# Altium PCB Fujitsu_ESPHome.PcbDoc
Units mm, origin at the board's own origin, x right, y up, seen from the top; angles counter-clockwise.
Board outline 24.05 x 24.05 mm, 4 copper layers (Top Layer, Layer 2, Layer 3, Bottom Layer), stack 1.57 mm thick; 30 components, 16 nets, 80 pads, 49 vias.
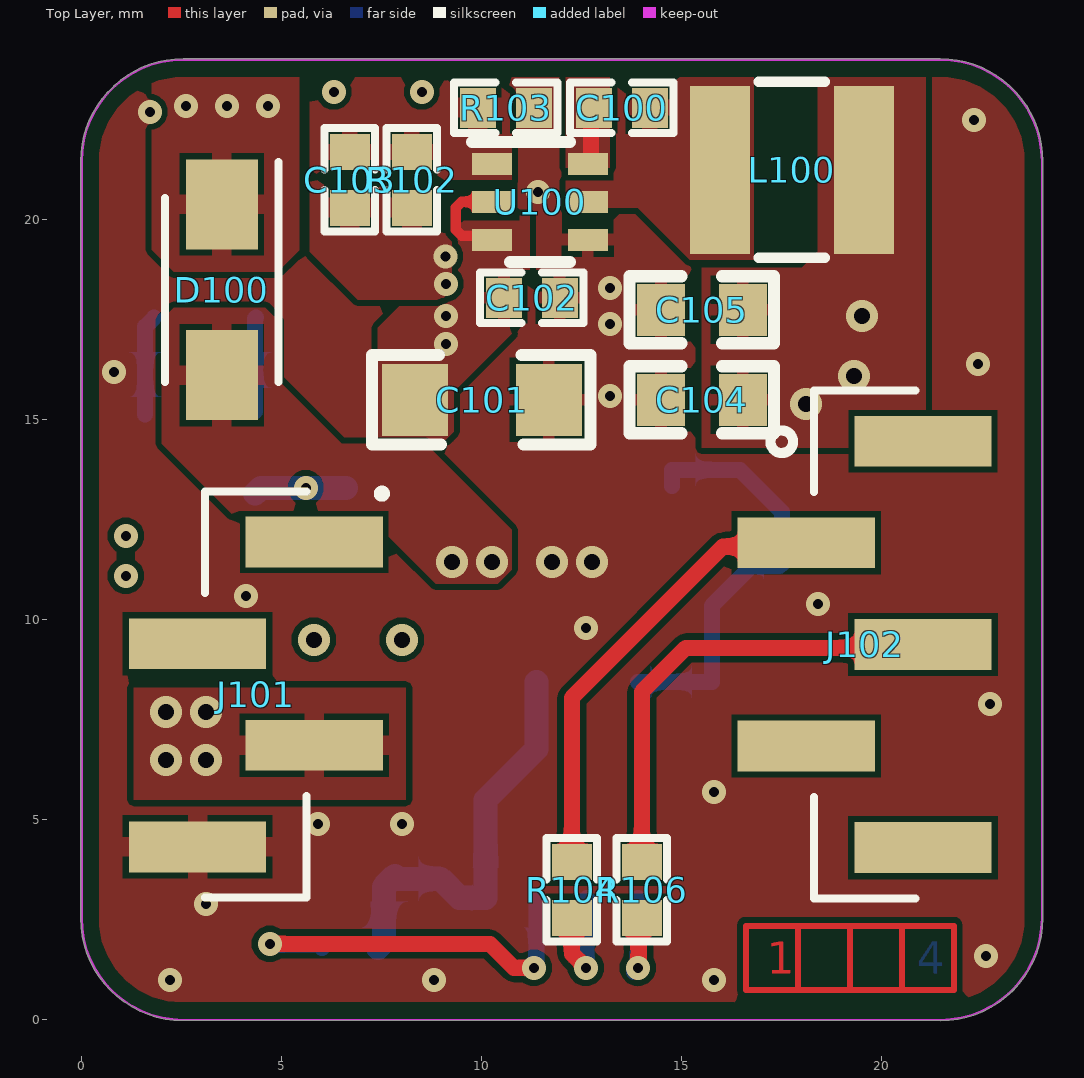
[diagram p0: Top Layer view]
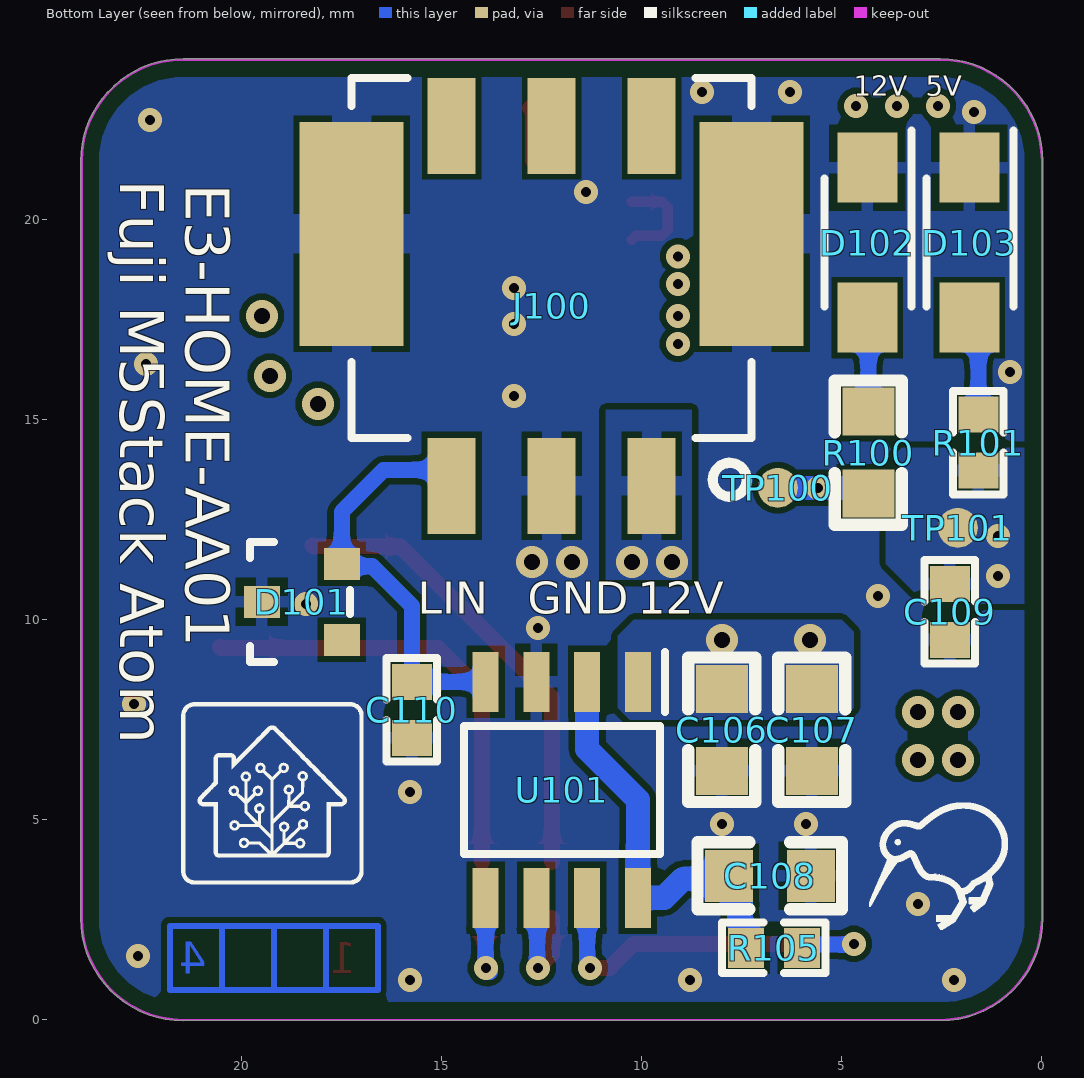
[diagram p1: Bottom Layer view, seen from below]
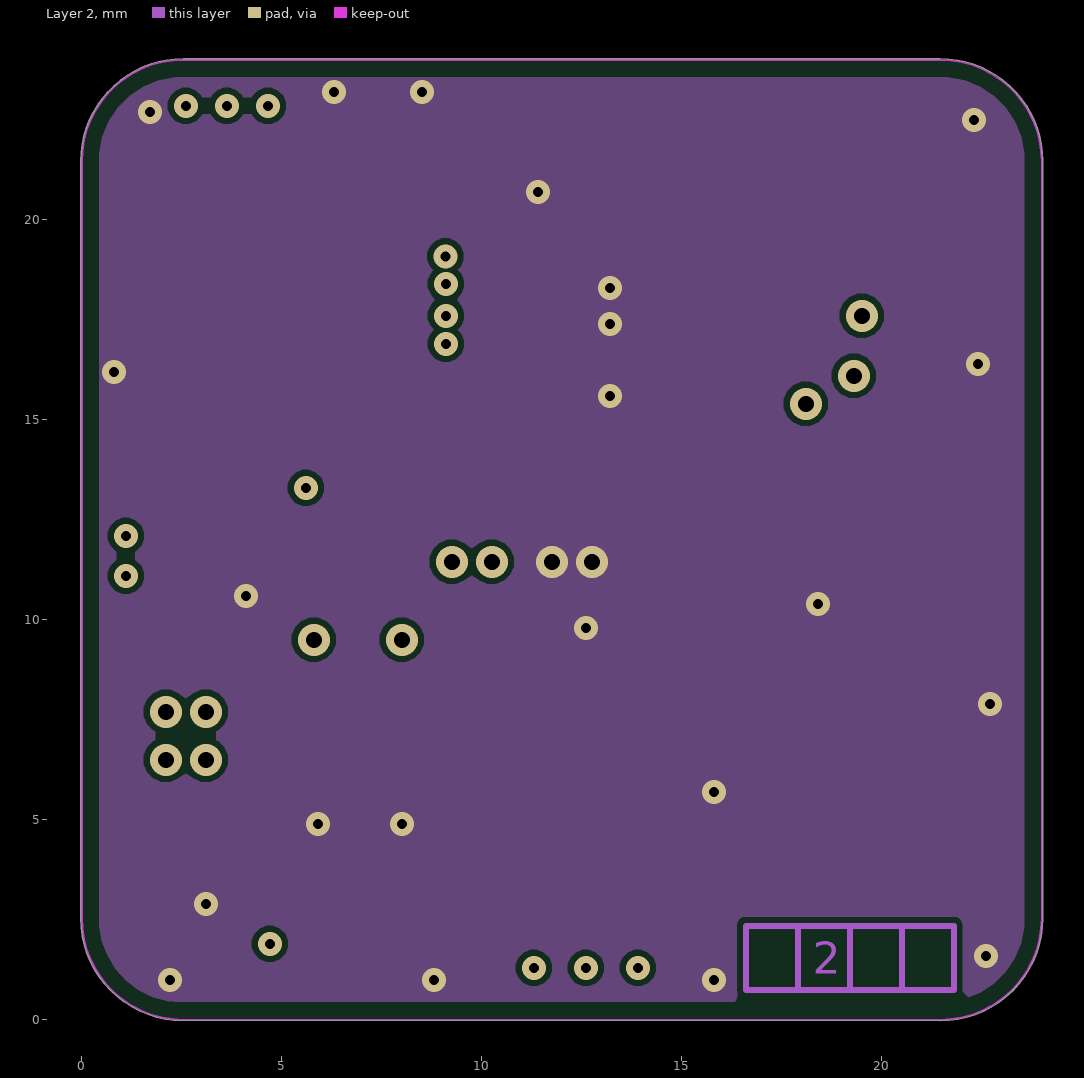
[diagram p2: Layer 2]
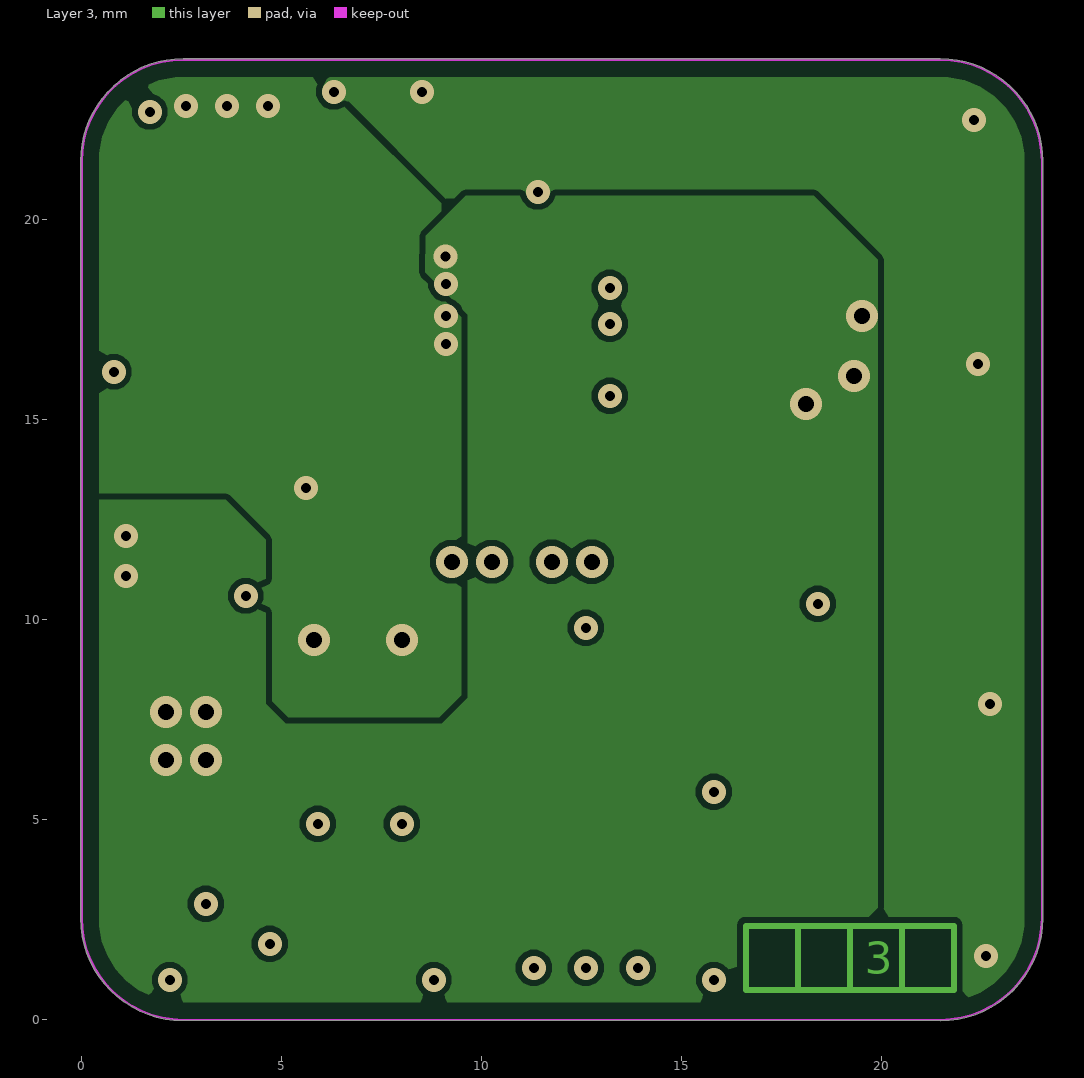
[diagram p3: Layer 3]
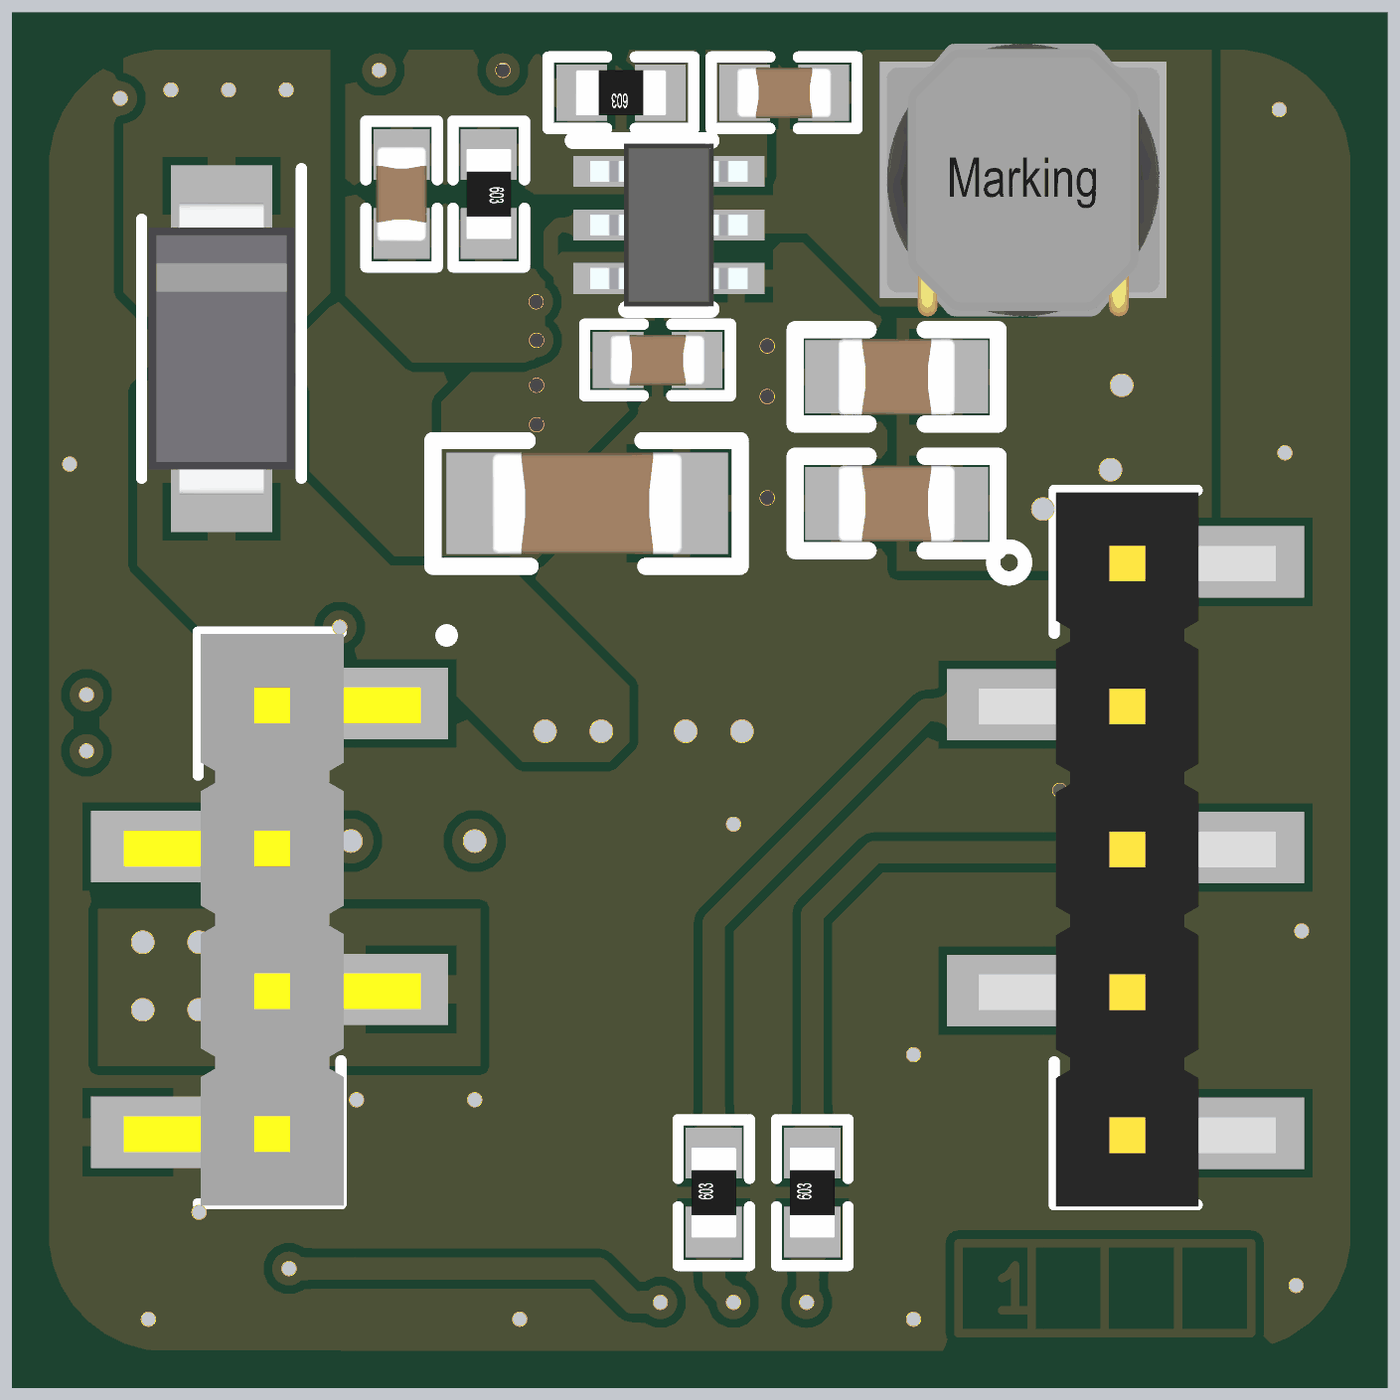
[diagram p4: 3D render of the assembled board from above, using the file's embedded part models]
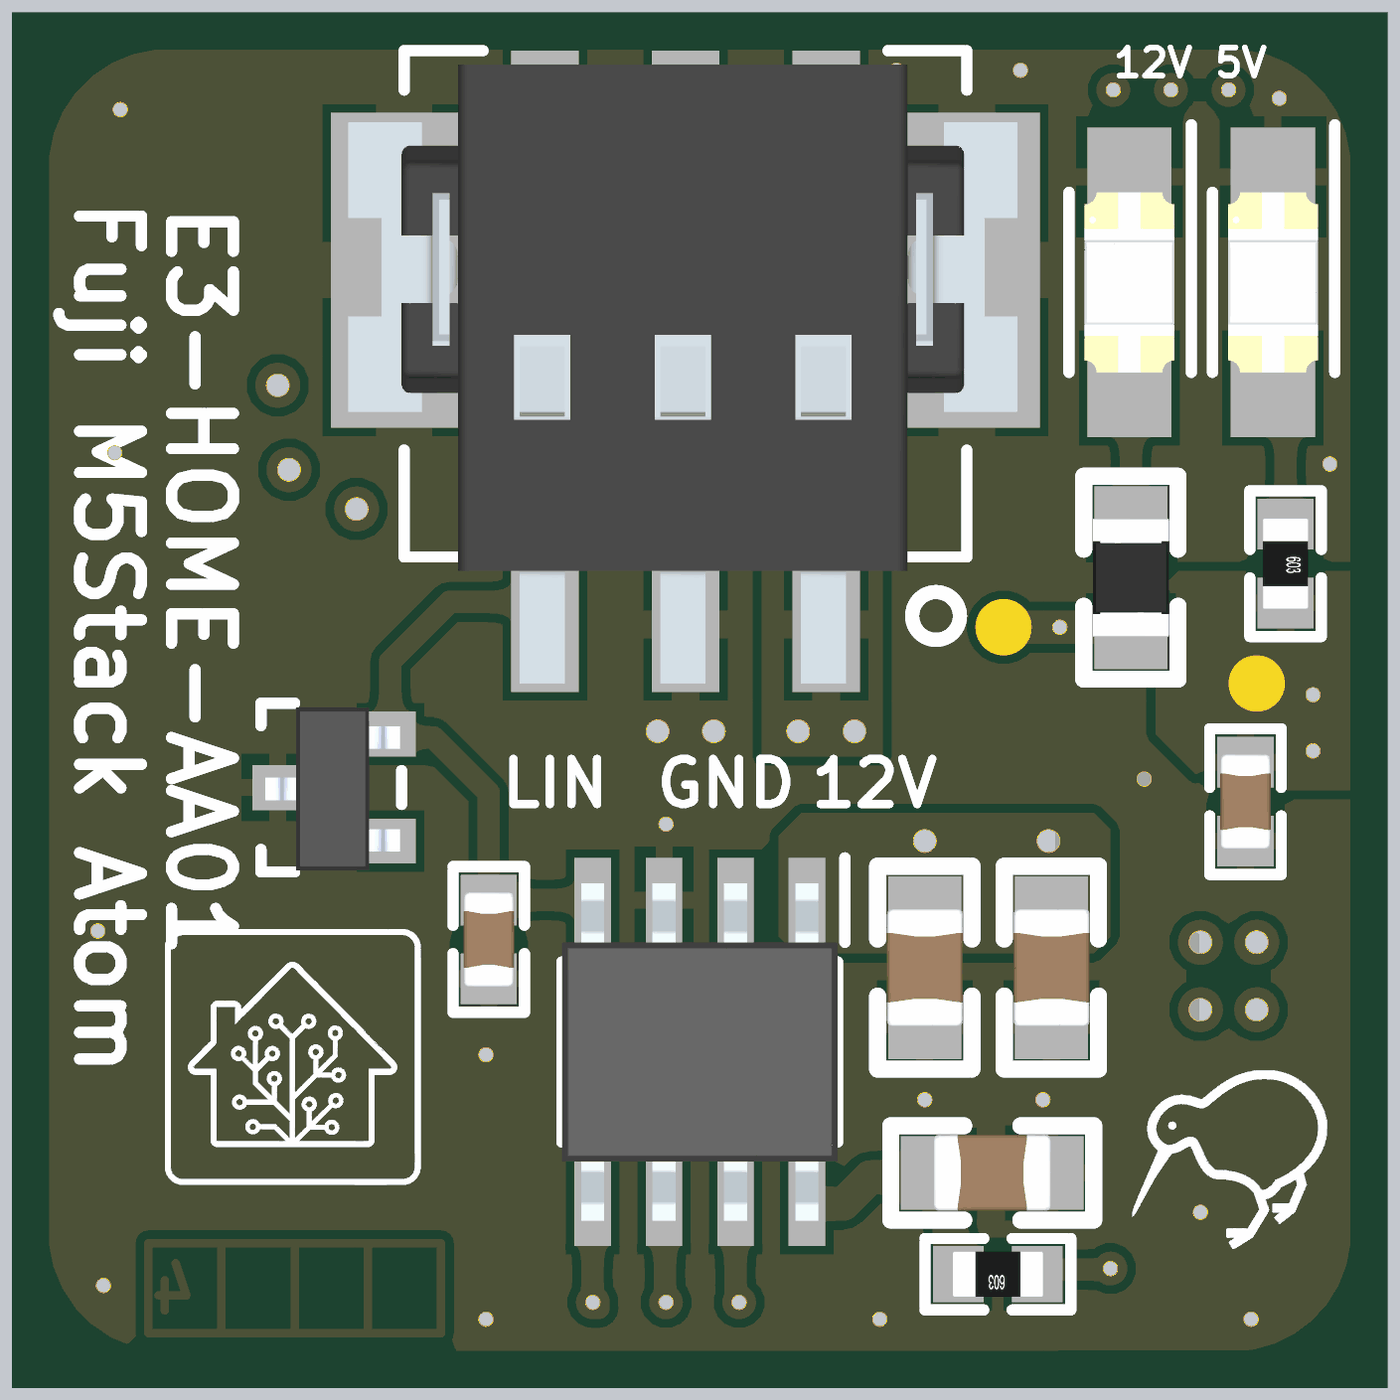
[diagram p5: 3D render of the assembled board from below, using the file's embedded part models]

## Layer stack, top to bottom
Top Solder: solder mask 0.0102, Solder Resist, Dk 3.5
Top Layer: signal copper 0.035
Dielectric 1: prepreg 0.36, FR-4, Dk 4.8
Layer 2: signal copper 0.035
Dielectric 2: core 0.71, FR-4, Dk 4.8
Layer 3: signal copper 0.035
Dielectric 3: prepreg 0.36, FR-4, Dk 4.8
Bottom Layer: signal copper 0.035
Bottom Solder: solder mask 0.0102, Solder Resist, Dk 3.5

## Board outline
2.305,-0.015 cw(c2.54,2.54) -0.025,2.54 -0.025,21.46 cw(c2.54,21.46) 2.54,24.025 21.46,24.025 cw(c21.46,21.46) 24.025,21.46 24.025,2.54 cw(c21.46,2.54) 21.46,-0.025

## Design rules (kind name [scope] priority, off if disabled: settings)
AssemblyTestPointUsage [All] p1: allowmultiple=TRUE
AssemblyTestpoint [All] p1: testpointundercomponent=FALSE minsize=0.99 maxsize=5 preferedsize=1 minholesize=0 maxholesize=1 preferedholesize=0 testpointgrid=0.025 usegrid=FALSE gridtolerance=0 allowsidetop=TRUE allowsidebottom=TRUE minspacing=2.03
BoardOutlineClearance BoardOutlineClearance_Overlay [OnLayer('Top Overlay')  or OnLayer('Bottom Overlay')] p1: gap=0 ignorepadtopadclearanceinfootprint=FALSE
BoardOutlineClearance [All] p2: gap=0.45 ignorepadtopadclearanceinfootprint=FALSE
Clearance "Clearance Mires" [InComponent('Mire*')] p1: gap=0.75 ignorepadtopadclearanceinfootprint=FALSE
Clearance Clearance-xPP-xTP-xTT [All] p2: gap=0.15 ignorepadtopadclearanceinfootprint=TRUE
ComponentClearance ComponentClearance_TP [InComponent('TP*') vs InComponent('TP*')] p1: gap=1.5 collisioncheckmode=3 verticalgap=0.5 showdistances=FALSE
ComponentClearance [All] p2: gap=0.2 collisioncheckmode=3 verticalgap=0 showdistances=FALSE
DiffPairsRouting [All] p1: maxlimit=0.2 minlimit=0.2 mostfreqgap=0.2 toplayer_minwidth=0.2 toplayer_maxwidth=0.2 toplayer_prefwidth=0.2 midlayer1_minwidth=0.2 midlayer1_maxwidth=0.2 midlayer1_prefwidth=0.2 midlayer2_minwidth=0.2 midlayer2_maxwidth=0.2 midlayer2_prefwidth=0.2 bottomlayer_minwidth=0.2 bottomlayer_maxwidth=0.2 bottomlayer_prefwidth=0.2 maxuncoupledlength=13
FabricationTestPointUsage [All] p1: valid=0 allowmultiple=TRUE
FabricationTestpoint [All] p1: side=3 testpointundercomponent=FALSE minsize=0.99 maxsize=5 preferedsize=1 minholesize=0 maxholesize=1 preferedholesize=0 testpointgrid=0.025 allowsidetop=TRUE allowsidebottom=TRUE usegrid=FALSE gridtolerance=0 minspacing=2.03
Height [All] p1: minheight=0 maxheight=28 prefheight=12.5 // 28mm : hauteur petit four
HoleSize HoleSize-PTH [All] p1: absolutevalues=TRUE maxlimit=4 minlimit=0.15 maxpercent=80.000 minpercent=20.000
HoleToHoleClearance [All] p1: gap=0.2 allowstackedmicrovias=FALSE
MatchedLengths [InDifferentialPairClass('All Differential Pairs')] p1: tolerance=0.2 checknetsindiffpair=TRUE checkdiffpairvsdiffpair=FALSE checkxsignals=FALSE checkothers=FALSE
MinimumAnnularRing "Minimum IAR  >0.45mm" [((ObjectKind = 'Pad') OR (ObjectKind = 'Via')) And (Layer = 'MultiLayer') And (HoleDiameter > AsMM(0.45))] p1: minimumring=0.15 // minimum inner annular ring for pads > 0.45mm finished hole size
MinimumAnnularRing "Minimum IAR <=0.45mm" [((ObjectKind = 'Pad') OR (ObjectKind = 'Via')) And (Layer = 'MultiLayer') And (HoleDiameter <= AsMM(0.45))] p2: minimumring=0.125 // minimum inner annular ring for pads <= 0.45mm finished hole size
MinimumSolderMaskSliver [All] p1: minsoldermaskwidth=0.1
PlaneClearance PlaneClearance-IPI [All] p1: clearance=0.2
PlaneConnect [All] p1: pad.planeconnectstyle=Relief pad.reliefexpansion=0.2 pad.reliefentries=4 pad.reliefconductorwidth=0.2 pad.reliefairgap=0.2 via.planeconnectstyle=Direct via.reliefexpansion=0.175 via.reliefentries=4 via.reliefconductorwidth=0.2 via.reliefairgap=0.2
PolygonConnect PolygonConnect-Full [All vs InPolygonClass('Full')] p1: thpad.connectstyle=Relief thpad.reliefconductorwidth=0.3 thpad.reliefentries=4 thpad.polygonreliefangle="90 Angle" thpad.airgapwidth=0.2 smdpad.connectstyle=Direct smdpad.reliefconductorwidth=0.2 smdpad.reliefentries=4 smdpad.polygonreliefangle="90 Angle" smdpad.airgapwidth=0.15 via.connectstyle=Direct via.reliefconductorwidth=0.2 via.reliefentries=4 via.polygonreliefangle="90 Angle" via.airgapwidth=0.15
PolygonConnect PolygonConnect-xTW [All] p2: thpad.connectstyle=Relief thpad.reliefconductorwidth=0.3 thpad.reliefentries=4 thpad.polygonreliefangle="90 Angle" thpad.airgapwidth=0.2 smdpad.connectstyle=Relief smdpad.reliefconductorwidth=0.3 smdpad.reliefentries=4 smdpad.polygonreliefangle="90 Angle" smdpad.airgapwidth=0.2 via.connectstyle=Direct via.reliefconductorwidth=0.2 via.reliefentries=4 via.polygonreliefangle="90 Angle" via.airgapwidth=0.15
RoutingCorners [All] p1: cornerstyle=45-Degree minsetback=2.5 maxsetback=2.5
RoutingLayers [All] p1: top layer_v5=TRUE mid layer 1_v5=FALSE mid layer 2_v5=FALSE bottom layer_v5=TRUE
RoutingVias [All] p1: holewidth=0.15 width=0.5 viastyle="Through Hole" minholewidth=0.15 minwidth=0.5 maxholewidth=0.2 maxwidth=0.6 useviatemplates=TRUE viatemplateguid#1={6DD71CDC-54A3-47C1-A7D8-5A110E9AF148} viatemplateguid#2={082E8A28-E7FB-4A83-87C6-A1A99772F00C} viatemplateguid#3={939C714F-5D4A-4B2A-A1F1-60A581F9FBD7} viatemplateguid#4={54C6AECE-85AB-4322-93B8-8F76CF948F42} viatemplatename#1=v50h15m0mx0 viatemplatename#2=v60h25m0mx0 viatemplatename#3=v80h40m0mx0 viatemplatename#4=v300h300
SilkToSilkClearance [All] p1 off: silktosilkclearance=0.02
SilkToSolderMaskClearance SilkscreenOverComponentPads [IsPad] p1: minsilkscreentomaskgap=0.02 clearancetoexposedcopper=TRUE
SolderMaskExpansion SolderMaskExpansion_via [IsVia] p1: expansion=0 istentingtop=TRUE
SolderMaskExpansion SolderMaskExpansion_pad [IsPad] p2: expansion=0 istentingtop=FALSE
SupplyNets "Schematic Supply Nets_4" [InNet('12V')] p1: voltage=0.000
SupplyNets "Schematic Supply Nets_3" [InNet('12V_FP')] p2: voltage=0.000
SupplyNets "Schematic Supply Nets_2" [InNet('3V3')] p3: voltage=0.000
SupplyNets "Schematic Supply Nets_1" [InNet('GND')] p4: voltage=0.000
SupplyNets "Schematic Supply Nets" [InNet('5V')] p5: voltage=0.000
UnRoutedNet [not(IsTrack and OnLayer('Multi-Layer'))] p1: checkbadconnections=TRUE
Width Width-xTW [All] p1: maxlimit=2.5 minlimit=0.2 preferedwidth=0.2
13 further rules are at their usual default settings.

## Classes and differential pairs
net class 12V: 12V_FP
net class 2A: 12V_FP
net class 2AMP: 5V

## Components (designator, comment, footprint, x,y, rotation, side; value= is the part's Value field where it differs from the comment)
C100 "100nF" 0603_CAPA 13.5,22.8 r0 top
C101 "10uF" 1206_CAPA 10,15.5 r0 top
C102 "100nF" 0603_CAPA 11.25,18.05 r0 top
C103 "47pF" 0603_CAPA 6.7,21 r90 top
C104 "22uF" 0805_CAPA 15.5,15.5 r180 top
C105 "22uF" 0805_CAPA 15.5,17.75 r180 top
C106 "22uF" 0805_CAPA 8,7.25 r270 bottom
C107 "22uF" 0805_CAPA 5.75,7.25 r270 bottom
C108 "22uF" 0805_CAPA 6.8,3.6 r180 bottom
C109 "100nF" 0603_CAPA 2.3,10.2 r270 bottom
C110 "220pF" 0603_CAPA 15.75,7.75 r270 bottom
D100 "B340A-13-F" DIODE_B340A-13-F 3.5,18.25 r270 top
D101 "MMBZ27VAL-7-F" ESD_MMBZ27VAL-7-F 19.5,10.45 r90 bottom
D102 "APT3216LZGCK" LED_APT3216LZGCK 4.362,19.43 r90 bottom
D103 "APT3216LZGCK" LED_APT3216LZGCK 1.812,19.43 r90 bottom
J100 "691805010303" 691805010303 12,18.6 r180 bottom
J101 "TSM-104-01-L-SV-P-TR" TSM-104-01-L-SV-P-TR 4.25,8.15 r270 top
J102 "TSM-105-01-F-SV" TSM-105-01-F-SV 19.7,9.35 r90 top locked
L100 "SRN5040TA-6R8M" INDUCTOR_652-SRN5040TA-100M 17.75,21.25 r0 top
R100 "3K" 0805_RES 4.337,14.18 r270 bottom
R101 "1K" 0603_RES 1.587,14.43 r270 bottom
R102 "158K" 0603_RES 8.25,21 r270 top
R103 "30K1" 0603_RES 10.6,22.8 r180 top
R104 "0" 0603_RES 12.25,3.25 r90 top
R105 "30K1" 0603_RES 6.7,1.8 r0 bottom
R106 "0" 0603_RES 14,3.25 r90 top
TP100 "5V_BUCK" PTEST 6.6,13.3 r90 bottom
TP101 "5V_BUCK" PTEST 2.1,12.3 r90 bottom
U100 "AP63300WU-7" POWER_BUCK_AP63300WU-7 11.45,20.45 r0 top
U101 "MCP2025-330E-SN" MCP2025-330E-SN 12,5.75 r270 bottom

## Footprints (in the part's own frame and the unit in brackets; to place one, negate y for a bottom-side part, rotate by r counter-clockwise, add the part's x,y. Pads: shape width x height; smd on the part's side, far side on the other; paste and mask are expansions set on the pad)
0603_CAPA [mm]
  rect 0.9x1 smd: 1(-0.7,0) 2(0.7,0)
  silkscreen extent -1.3,-0.64 1.3,0.64, body extent -0.85,-0.45 0.85,0.45, height 0.91
0603_RES [mm]
  rect 0.9x1 smd: 1(-0.7,0) 2(0.7,0)
  silkscreen extent -1.3,-0.63 1.3,0.64, body extent -0.8,-0.4 0.8,0.4, height 0.3
0805_CAPA [mm]
  rect 1.2x1.3 smd: 1(-1.025,0) 2(1.025,0)
  silkscreen extent -1.8,-0.84 1.8,0.84, body extent -1.05,-0.67 1.05,0.68, height 1.36
0805_RES [mm]
  rect 1.2x1.3 smd: 1(-1.025,0) 2(1.025,0)
  silkscreen extent -1.8,-0.84 1.8,0.84, body extent -1.05,-0.67 1.05,0.68, height 0.61
1206_CAPA [mm]
  rect 1.65x1.8 smd: 1(-1.675,0) 2(1.675,0)
  silkscreen extent -2.74,-1.12 2.72,1.12, body extent -1.7,-0.9 1.7,0.9, height 1.8
691805010303 [mm]
  rect 1.2x2.4 smd: 1(2.247,-5.252) 2(-0.253,-5.252) 3(-2.753,-5.252) 4(2.247,3.748) 5(-0.253,3.748) 6(-2.753,3.748)
  rect 2.6x5.6 smd: MP1(4.747,1.048) MP2(-5.253,1.048)
  silkscreen extent -5.25,-5.52 4.75,4.95, body extent -6.25,-6.3 5.65,4.7, height 5
DIODE_B340A-13-F [mm]
  rect 2.25x1.8 smd: 1(-2.134,0) 2(2.134,0)
  silkscreen extent -3.2,-1.42 2.3,1.42, body extent -2.6,-1.3 2.6,1.3, height 2.4
ESD_MMBZ27VAL-7-F [mm]
  rect 0.8x0.9 smd: 1(-0.95,-2) 2(0.95,-2) 3(0,0)
  silkscreen extent -1.5,-2.2 1.5,0.3, body extent -1.48,-2.17 1.42,0.23, height 1.15
INDUCTOR_652-SRN5040TA-100M [mm] "SRN5040TA-100M"
  rect 1.5x4.2 smd: 1(-1.8,0) 2(1.8,0)
  silkscreen extent -0.82,-2.2 0.83,2.2, body extent -2.43,-2.42 2.42,2.43, height 3.86
LED_APT3216LZGCK [mm]
  rect 1.75x1.5 smd: 1(-1.875,0) 2(1.875,0)
  silkscreen extent -1.6,-1.1 2.8,1.07, body extent -1.6,-0.8 1.6,0.8, height 1.1
MCP2025-330E-SN [mm]
  rect 1.5x0.65 smd: 1(-2.7,1.905) 2(-2.7,0.635) 3(-2.7,-0.635) 4(-2.7,-1.905) 5(2.7,-1.905) 6(2.7,-0.635) 7(2.7,0.635) 8(2.7,1.905)
  silkscreen extent -3.45,-2.45 1.6,2.58, body extent -3,-2.45 3,2.45, height 1.75
POWER_BUCK_AP63300WU-7 [mm] "TSOT à 5 pins"
  rect 1x0.55 smd: 1(-1.2,0.95) 2(-1.2,0) 3(-1.2,-0.95) 4(1.2,-0.95) 5(1.2,0) 6(1.2,0.95)
  silkscreen extent -1.7,-1.5 0.75,1.5, body extent -1.4,-1.45 1.4,1.45, height 0.9
PTEST [mm]
  round 1 smd paste-2539.97: 1(0,0)
TSM-104-01-L-SV-P-TR [mm]
  rect 1.27x3.43 smd: 1(-3.792,1.564) 2(-1.252,-1.356) 3(1.288,1.564) 4(3.828,-1.356)
  silkscreen extent -5.1,-1.17 5.1,3.35, body extent -5.03,-2.49 5.13,2.79, height 9.68
TSM-105-01-F-SV [mm]
  rect 1.27x3.43 smd: 1(5.113,-1.331) 2(2.573,1.589) 3(0.033,-1.331) 4(-2.507,1.589) 5(-5.047,-1.331)
  silkscreen extent -6.32,-1.14 6.38,2.48, body extent -6.35,-2.54 6.35,2.74, height 9.65

## Part data
C100 C102 C109: library part CAPA_CMS_100nF_50V_0603_5%_X7R, "100nF_50V_0603_5%_X7R", Tolerance=5%, Manufacturer Part Number=CAPA_CMS_100nF_50V_0603_5%_X7R, Mounting Type=CMS
C101: library part CAPA_CMS_10uF_50V_1206_10%_X7R, "10uF_50V_1206_10%_X7R", Tolerance=10%, Manufacturer Part Number=CAPA_CMS_10uF_50V_1206_10%_X7R, Mounting Type=CMS
C103: library part CAPA_CMS_47pF_50V_0603_5%_X7R, "47pF_50V_0603_5%_X7R", Tolerance=5%, Manufacturer Part Number=CAPA_CMS_47pF_50V_0603_5%_X7R, Mounting Type=CMS
C104 C105 C106 C107 C108: library part CAPA_CMS_22uF_16V_0805_10%_X5R, "22uF_16V_0805_10%_X5R", Tolerance=10%, Manufacturer Part Number=CAPA_CMS_22uF_16V_0805_10%_X5R, Mounting Type=CMS
C110: library part CAPA_CMS_220pF_50V_0603_10%_X7R, "220pF_50V_0603_10%_X7R", Tolerance=10%, Manufacturer Part Number=CAPA_CMS_220pF_50V_0603_10%_X7R, Mounting Type=CMS
D100: "Diodes et redresseurs Schottky 40V 3A", Current Rating=3A, Manufacturer=Diodes, Voltage Rating=40V, ComponentLink1Description=https://www.mouser.fr/datasheet/2/115/ds30891-89887.pdf, Diode Type=Schottky, Life Status=Active, Manufacturer Part Number=B340A-13-F, Mounting Type=CMS
D101: "Suppresseurs ESD / diodes TVS 27V 225mW", Voltage Rating=27V, ComponentLink1Description=https://www.mouser.fr/datasheet/2/115/DIOD_S_A0012799209_1-2543783.pdf, Diode Type=TVS, Life Status=Active, Manufacturer Part Number=MMBZ27VAL-7-F, Mounting Type=CMS
D102 D103: "LED CMS Green 3.2x1.6mm", Color=Green, Manufacturer=Kingbright, Nominal Current=20mA, Supplier Part Number 1=604-APT3216LZGCK, ComponentLink1Description=https://www.kingbrightusa.com/images/catalog/SPEC/APT3216LZGCK.pdf, Life Status=Active, Light Intensity=100mcd, Manufacturer Part Number=APT3216LZGCK, Mounting Type=CMS, Supplier 1=Mouser
J100: "WR-TBL Series 8050 - 3 pins 2.50 mm Screwless SMT", Manufacturer="Wurth Elektronik", Supplier Part Number 1=710-691805010303, ComponentLink1Description=https://www.we-online.com/components/products/datasheet/691805010303.pdf, Connector Type=BORNIER, Life Status=Active, Manufacturer Part Number=691805010303, Mounting Type=CMS, Supplier 1=Mouser
J101: "Header male SMD 1x4", Manufacturer=Samtec, ComponentLink1Description=https://suddendocs.samtec.com/catalog_english/tsm.pdf, Connector Type=HEADER, Life Status=Active, Manufacturer Part Number=TSM-104-01-L-SV-P-TR, Mounting Type=CMS
J102: "Header male SMD 1x5", Manufacturer=SAMTEC, Supplier Part Number 1=200-TSM10501FSV, ComponentLink1Description=https://suddendocs.samtec.com/catalog_english/tsm.pdf, Connector Type=HEADER, Life Status=Active, Manufacturer Part Number=TSM-105-01-F-SV, Mounting Type=CMS, Supplier 1=Mouser
L100: "Inductance fixes 6.8uH 2.5A", Current Rating=2.5A, Inductance=6.8uH, Manufacturer=Bourns, ComponentLink1Description=https://www.mouser.fr/ProductDetail/Bourns/SRN5040TA-6R8M?qs=qSfuJ%252Bfl%2Fd6O0PuOfrvvvw%3D%3D, Life Status=Active, Manufacturer Part Number=SRN5040TA-6R8M, Mounting Type=CMS
R100: library part RES_CMS_3K_1/8W_0805_1%, "3K_1/8W_0805_1%", Tolerance=1%, Manufacturer Part Number=RES_CMS_3K_1/8W_0805_1%, Mounting Type=CMS
R101: library part RES_CMS_1K_1/10W_0603_1%, "1K_1/10W_0603_1%", Tolerance=1%, Manufacturer Part Number=RES_CMS_1K_1/10W_0603_1%, Mounting Type=CMS
R102: library part RES_CMS_158K_1/16W_0603_1%, "158K_1/16W_0603_1%", Tolerance=1%, Manufacturer Part Number=RES_CMS_158K_1/16W_0603_1%, Mounting Type=CMS
R103 R105: library part RES_CMS_30K1_1/10W_0603_1%, "30K1_1/10W_0603_1%", Tolerance=1%, Manufacturer Part Number=RES_CMS_30K1_1/10W_0603_1%, Mounting Type=CMS
R104 R106: library part RES_CMS_0_1/10W_0603_1%, "0_1/10W_0603_1%", Tolerance=1%, Manufacturer Part Number=RES_CMS_0_1/10W_0603_1%, Mounting Type=CMS
TP100 TP101: library part PTEST, "Test point", Manufacturer=OPENINDUS, Component Type=TEST_POINT, Manufacturer Part Number=PTEST, Mounting Type=NONE
U100: "Régulateurs de tension de commutation DCDC Conv HV Buck TSOT26 T&R 3K", Manufacturer="Diodes Incorporated", Component Type=POWER, ComponentLink1Description=https://www.mouser.fr/ProductDetail/Diodes-Incorporated/AP63300WU-7?qs=%2Fha2pyFadugaSvYQ6ijkxuBwxLy95hAk9rc3GTfKFIE%3D, Manufacturer Part Number=AP63300WU-7, Mounting Type=CMS
U101: library part MCP2025-330E/SN, "LIN Transceiver with Voltage Regulator SOIC 3.3V", Manufacturer=Microchip, Supplier Part Number 1=579-MCP2025-330E/SN, Component Type=TRANSCEIVER, ComponentLink1Description=https://ww1.microchip.com/downloads/en/DeviceDoc/20002306B.pdf, Life Status=Active, Manufacturer Part Number=MCP2025-330E/SN, Mounting Type=CMS, Supplier 1=Mouser

## Via types
v1: diameter 0.6, hole 0.25, Top Layer to Bottom Layer, tented both sides, 36 vias
v2: diameter 0.8, hole 0.4, Top Layer to Bottom Layer, tented both sides, 13 vias

## Nets (pads, with @x,y where several pads share a name; then routed paths per layer and width w, separated by ;. In a path a pad name is that pad's centre, name@x,y a point inside that pad or via, vN(x,y) a via of type N, cw(c..) or ccw(c..) an arc to the next point about the centre after c; other vN are vias at no path point)
3V3: C108.1 R105.2 U101.2 U101.8 | length 10.4
  Bottom Layer w0.6: R105.2 7.55,1.95 7.55,3.325 C108.1 ; C108.1@7.825,3.55 7.851,3.524 8.974,3.524 9.448,3.05 U101.8 10.095,5.495 11.365,6.765 U101.2
5V: C103.1 C104.1 C105.1 C109.1 J101.3 L100.2 R101.2 R102.2 TP101.1
  other v1: 1.1,11.1 1.1,12.1 9.1,18.4 9.092,19.084
  other v2: 2.1,6.5 3.1,6.5 2.1,7.7 3.1,7.7 18.1,15.4 19.3,16.1 19.5,17.6
12V: D100.2 J100.1
  other v2: 9.25,11.45 10.25,11.45
12V_FP: C101.1 C102.1 C106.1 C107.1 D100.1 R100.2 TP100.1 U100.2 U100.3 U101.1 | length 4.8
  Top Layer w0.254: U100.3 10.15,19.6 9.499,19.6 9.35,19.749 9.35,20.301 9.499,20.45 U100.2
  Bottom Layer w0.6: R100.2 4.482,13.3 TP100.1
  other v1: 5.6,13.3 9.1,16.9 9.1,17.6 2.6,22.85 3.625,22.85 4.65,22.85
  other v2: 5.8,9.5 8,9.5
GND: C101.2 C102.2 C104.2 C105.2 C106.2 C107.2 C108.2 C109.2 C110.2 D101.3 D102.2 D103.2 J100.2 J100.MP1 J100.MP2 J101.4 R103.1 U100.4 U101.3
  other v1: 2.2,1 8.8,1 15.8,1 22.6,1.6 3.1,2.9 5.9,4.9 8,4.9 15.8,5.7 22.7,7.9 12.6,9.8 18.4,10.4 4.1,10.6 13.2,15.6 0.8,16.2 22.4,16.4 13.2,17.4 13.2,18.3 11.4,20.7 22.3,22.5 1.7,22.7 6.3,23.2 8.5,23.2
  other v2: 11.75,11.45 12.75,11.45
LIN: C110.1 D101.2 J100.3 U101.4 | length 10.8
  Bottom Layer w0.4: U101.4 C110.1 15.75,10.35 16.742,11.342 17.442,11.342 D101.2 17.5,12.7 16.452,13.748 14.753,13.748 J100.3
NetC100_1: C100.1 U100.6 | length 1.5
  Top Layer w0.4: U100.6 12.725,21.475 12.725,22.725 C100.1
NetC100_2: C100.2 L100.1 U100.5
NetC103_2: C103.2 R102.1 R103.2 U100.1
NetD102_1: D102.1 R100.1 | length 2.4
  Bottom Layer w0.4: R100.1 4.337,17.53 D102.1
NetD103_1: D103.1 R101.1 | length 2.5
  Bottom Layer w0.4: R101.1 1.587,17.33 D103.1
NetR105_1: R105.1 U101.7 | length 10
  Top Layer w0.4: v1(4.7,1.9) 10.2,1.9 10.8,1.3 v1(11.3,1.3)
  Bottom Layer w0.4: v1(4.7,1.9) 4.719,1.881 5.919,1.881 R105.1 ; v1(11.3,1.3) 11.365,1.365 U101.7
Rx: J102.3 R106.2 | length 11.3
  Top Layer w0.4: R106.2 14,8.2 15.1,9.3 20.526,9.3 J102.3@20.547,9.321
RxD: R106.1 U101.5 | length 3.4
  Top Layer w0.4: v1@13.9,1.2 13.919,1.219 13.919,2.469 R106.1
  Bottom Layer w0.4: v1@13.9,1.2 13.8,1.2 13.905,1.305 U101.5
  other v1: 13.9,1.3
Tx: J102.2 R104.2 | length 11.7
  Top Layer w0.4: R104.2 12.25,8.05 16.03,11.83 18.196,11.83 J102.2@18.227,11.861
TxD: R104.1 U101.6 | length 3.2
  Top Layer w0.4: R104.1 12.25,1.65 v1(12.6,1.3)
  Bottom Layer w0.4: v1(12.6,1.3) 12.617,1.317 12.617,3.033 U101.6
pads on no net: D101.1 J100.4 J100.5 J100.6 J101.1 J101.2 J102.1 J102.4 J102.5

## Polygon pours and split planes (outlines as drawn)
GND on Bottom Layer "NONET_L03_P-001" (solid, remove dead copper, pour order 18): 0,0 0,24 24,24 24,0
5V on Bottom Layer "NONET_L03_P-001" (solid, remove dead copper, pour order 13): 0.2,14.3 0.2,10.4 2.9,10.4 3.9,11.4 3.9,13.9 3.5,14.3
12V_FP on Bottom Layer "NONET_L03_P-001" (solid, remove dead copper, pour order 15): 10.2,10 5,10 4.7,9.7 4.7,7.8 5,7.5 10.3,7.5 10.6,7.8 10.6,9.6
12V on Bottom Layer "NONET_L03_P-001" (solid, remove dead copper, pour order 1): 8.75,15.25 10.9,15.25 10.9,11 8.75,11
GND on Top Layer "NONET_L03_P-001" (solid, remove dead copper, pour order 16): 0,0 0,24 24,24 24,0
5V on Top Layer "NONET_L03_P-001" (solid, remove dead copper, pour order 10): 18.4,23.6 18.4,19.2 18,18.8 15.5,18.8 15.5,14.3 21.1,14.3 21.1,23.6
12V_FP on Top Layer "NONET_L03_P-001" (solid, remove dead copper, pour order 7): 9.4,20.1 9.4,19.3 7.4,17.3 7.4,14.5 9.1,14.5 9.3,14.7 9.3,15.7 10.8,17.2 11.2,17.2 11.2,17.7 11.2,20.1
5V on Top Layer "NONET_L03_P-001" (solid, remove dead copper, pour order 5): 5.7,21 9.25,21 9.25,18.25 9,18 6.9,18 5.7,19.2
12V on Top Layer "NONET_L03_P-001" (solid, remove dead copper, pour order 2): 2,17.5 2,14.4 3.9,12.5 7.25,12.5 8.85,10.9 10.4,10.9 10.75,11.25 10.75,12.25 8.6,14.4 6.5,14.4 4.9,16 4.9,17.49 4.59,17.8 2.3,17.8
5V on Top Layer "NONET_L03_P-001" (solid, remove dead copper, pour order 12): 8.1,5.5 8.1,8.3 1.3,8.3 1.3,5.5
NetC100_2 on Top Layer "NONET_L03_P-001" (solid, remove dead copper, pour order 9): 13.3,23.6 13.3,21.2 13.2,21.1 12.1,21.1 12.1,20.3 13.9,20.3 15.2,19 16.8,19 16.8,23.6
NetC100_1 on Top Layer "NONET_L03_P-001" (solid, remove dead copper, pour order 8): 12.1,21.3 12.1,23.7 13.2,23.7 13.2,21.3
NetC103_2 on Top Layer "NONET_L03_P-001" (solid, remove dead copper, pour order 6): 10.75,24 5.7,24 5.7,21 10.75,21
12V_FP on Top Layer "NONET_L03_P-001" (solid, remove dead copper, pour order 4): 1.75,19.25 1.75,24 5.434,24 5.434,19.234 4.9,18.7 2.3,18.7
5V on Layer 3 "NONET_L03_P-001" (solid, remove dead copper, pour order 3): 8.602,19.602 8.592,18.683 9.65,17.624 9.65,8.05 9,7.4 5.1,7.4 4.6,7.9 4.6,12 3.6,13 -0.02,13 0,12.98 0,-0.1 17,-0.1 19.9,2.8 19.9,19 18.3,20.6 9.6,20.6
GND on Layer 3 "NONET_L03_P-001" (solid, remove dead copper, pour order 17): 0,0 0,24 24,24 24,0
12V_FP on Layer 3 "NONET_L03_P-001" (solid, remove dead copper, pour order 11): 0,24 0,7.4 9.5,7.4 9.5,19.903 5.383,24.011
GND on Layer 2 "NONET_L03_P-001" (solid, remove dead copper, pour order 0): 0,0 0,24 24,24 24,0

## Keep-outs
Keep-Out Layer:
  lines w0.05: 2.326,0 21.46,0 ccw(c21.46,2.54) 24,2.54 24,21.46 ccw(c21.46,21.46) 21.46,24 2.54,24 ccw(c2.54,21.46) 0,21.46 0,11.115 0,2.54 ccw(c2.54,2.54) 2.54,0

## Other copper
Top Layer:
  text "1" at 17.125,1.15 h0.8
Layer 2:
  text "2" at 18.275,1.15 h0.8
Layer 3:
  text "3" at 19.575,1.15 h0.8
Bottom Layer:
  text "4" at 20.875,1.15 h0.8
Multi-Layer:
  lines w0.15: 17.9,0.75 17.9,2.35 ; 19.2,0.75 19.2,2.35 ; 20.5,0.75 20.5,2.35 ; 16.6,0.75 21.8,0.75 21.8,2.35 16.6,2.35 16.6,0.75

## Silkscreen, mask and mechanical layers (free items; w line width, h text height)
Bottom Overlay:
  drawing of 4 lines, arcs and shapes, not listed
  text "5V" at 2.9,23.1 h0.5
  text "12V" at 4.7,23.1 h0.5
  text "Fuji M5Stack Atom" at 23.033,21 h1.1 r90
  text "E3-HOME-AA01" at 21.4,20.9 h1.1 r90
  text "12V" at 10.1,10.15 h0.8
  text "GND" at 12.85,10.15 h0.8
  text "LIN" at 15.6,10.15 h0.8
Board Shape:
  lines w0.4: -0.025,2.54 ccw(c2.54,2.54) 2.305,-0.015 21.46,-0.025 ccw(c21.46,2.54) 24.025,2.54 24.025,21.46 ccw(c21.46,21.46) 21.46,24.025 2.54,24.025 2.54,24.025 ccw(c2.54,21.46) -0.025,21.46 -0.025,2.54
Top Canister:
  lines w0.127: -49.808,-69.19 -49.808,-38.71 -14.248,-38.71 ; -49.808,-69.185 -14.248,-69.185 23.852,-69.185 100.052,-69.185 ; -14.248,-69.19 -14.248,-38.71 ; -14.248,-61.57 100.052,-61.57 ; -14.248,-53.95 100.052,-53.95 ; 24.042,-69.194 24.042,-38.71 ; 66.981,-69.19 66.981,-61.612 ; 77.192,-69.19 77.192,-61.625 ; 100.052,-38.71 23.852,-38.71 -14.248,-38.71 ; 100.105,-69.147 100.105,-38.667
  text "PROJET:" at 26.043,-41.25 h1.14
  text "ENGINEER:" at -12.064,-41.987 h1.14
  text ".Engineer" at -2.481,-43.946 h1.78
  text ".Company" at -2,-48 h1
  text ".Project" at 25.704,-48.753 h4
  text ".Company" at -48.5,-49.1 h1.5
  text "DATE:" at -12.978,-56.49 h1.14
  text "BOARD REF:" at 25.122,-56.49 h1.14
  text ".PRINT_DATE" at -11.708,-59.538 h1.78
  text "Kiwi road" at -48.252,-60.329 h1.78
  text ".BoardIdentifier-.PartNumber-.VersionRevision" at 27.576,-60.42 h1.78
  text "Toulouse" at -48.252,-63.047 h1.78
  text "LAYER:" at 25.176,-63.681 h1.14
  text "PAGE:" at 68.505,-63.856 h1.14
  text "VARIANT:" at -12.862,-63.995 h1.14
  text "France" at -48.252,-65.663 h1.78
  text "1/1" at 70.36,-66.607 h1.3
  text ".Print_Scale" at 80.412,-66.636 h1.78
  text ".Plot_File_Name" at 27.591,-66.922 h1.78
  text ".VariantName" at -11.705,-67.023 h1.78
  text "Ce document est confidentiel. Propriété de la société .Company" at 101.326,-68.108 h2
Bottom Canister:
  lines w0.127: -49.853,-69.02 -49.853,-38.54 ; -49.8,-69.058 26.4,-69.058 64.5,-69.058 100.06,-69.058 ; -49.8,-61.443 64.5,-61.443 ; -49.8,-53.823 64.5,-53.823 ; -49.8,-38.583 26.4,-38.583 64.5,-38.583 ; -26.94,-69.063 -26.94,-61.497 ; -16.729,-69.063 -16.729,-61.485 ; 26.21,-68.939 26.21,-38.583 ; 64.5,-69.063 64.5,-38.583 ; 100.06,-69.063 100.06,-38.583 64.5,-38.583
  text "PROJET:" at 24.209,-41.123 h1.14
  text "ENGINEER:" at 63.23,-41.123 h1.14
  text ".Engineer" at 53.647,-43.082 h1.78
  text "(OpenIndus)" at 44.503,-45.114 h1
  text ".Project" at 20.832,-47.571 h4
  text ".Company" at 98.984,-49.279 h1.5
  text "BOARD REF:" at 25.13,-56.363 h1.14
  text "DATE:" at 63.23,-56.363 h1.14
  text ".PRINT_DATE" at 61.96,-59.411 h1.78
  text "Kiwi road" at 98.504,-60.202 h1.78
  text ".BoardIdentifier-.PartNumber-.VersionRevision" at 22.384,-60.223 h1.78
  text "Toulouse" at 98.504,-62.92 h1.78
  text "LAYER:" at 24.017,-63.377 h1.14
  text "PAGE:" at -18.253,-63.729 h1.14
  text "VARIANT:" at 62.815,-63.762 h1.14
  text "France" at 98.504,-65.536 h1.78
  text ".Print_Scale" at -30.735,-65.973 h1.78
  text ".Plot_File_Name" at 22.263,-66.581 h1.78
  text "1/1" at -21.267,-66.734 h1.3
  text ".VariantName" at 61.108,-66.939 h1.78
  text "Ce document est confidentiel. Propriété de la société .Company" at 170,-67.912 h2
A4:
  lines w0.127: -54.906,-26.94 -49.826,-26.94 ; -54.906,21.32 -49.826,21.32 ; -54.906,69.58 -49.826,69.58 ; 18.119,112.76 18.119,117.84 ; 23.216,-75.195 23.216,-70.115 ; 91.144,112.76 91.144,117.84 ; 96.241,-75.195 96.241,-70.115 ; 164.169,112.76 164.169,117.84 ; 169.266,-75.195 169.266,-70.115 ; 232.114,-26.94 237.194,-26.94 ; 232.114,21.32 237.194,21.32 ; 232.114,69.58 237.194,69.58 ; -54.906,-75.2 -54.906,117.84 237.194,117.84 237.194,-75.2 -54.906,-75.2 ; -49.826,-70.12 -49.826,112.76 232.114,112.76 232.114,-70.12 -49.826,-70.12
  text "1" at -18.66,114.411 h1.78
  text "2" at 53.984,114.411 h1.78
  text "3" at 127.136,114.411 h1.78
  text "4" at 200.034,114.411 h1.78
  text "A" at -53.001,91.399 h1.78
  text "A" at 234.019,91.399 h1.78
  text "B" at -53.001,43.342 h1.78
  text "B" at 234.019,43.342 h1.78
  text "C" at -53.001,-5.172 h1.78
  text "C" at 234.019,-5.172 h1.78
  text "D" at -52.9,-48.1 h1.78
  text "D" at 234.019,-53.178 h1.78
  text "2" at 59.08,-73.544 h1.78
  text "3" at 132.232,-73.544 h1.78
  text "4" at 200.034,-73.549 h1.78
  text "1" at -15.6,-73.6 h1.78
PCB Characteristics:
  drawing of 312 lines, arcs and shapes, not listed
  text "Dimensions are in millimeters" at 77.014,106.88 h1.8
  text "PCB Characteristics" at 131.5,101.612 h2
  text "Dimensions : 24 x 24 mm" at 82,95.612 h1.8
  text "Surface finish : Selective Che Ni/Au" at 156,95.612 h1.8
  text ".BoardDescription" at -31,94.666 h5
  text "Substract : FR4 Improved TG 145-150 degC" at 82,91.612 h1.8
  text "Overlay : Top & Bottom side" at 156,91.612 h1.8
  text "Soldermask : Top & Bottom side" at 82,87.612 h1.8
  text "Overlay color : White" at 156,87.612 h1.8
  text "Soldermask color : Green" at 82,83.612 h1.8
  text "Holes tolerance : +/- 0.1mm except vias" at 156,83.612 h1.8
  text "External layers thicknesses are given after plating. / Board thickness is only informative and is given before pressing." at 75.9,73.212 h1.8
  text "Layer" at 78.31,69.811 h1.8
  text "Name" at 90.608,69.811 h1.8
  text "Material" at 118.5,69.811 h1.8
  text "Thickness" at 144.293,69.811 h1.8
  text "Constant" at 163.788,69.811 h1.8
  text "Gerber" at 180.884,69.811 h1.8
  text "Board Layer Stack" at 194.981,69.811 h1.8
  text "Top Overlay" at 90.608,66.211 h1.8
  text "GTO" at 180.884,66.211 h1.8
  text "Top Solder" at 90.608,62.611 h1.8
  text "Solder Resist" at 118.5,62.611 h1.8
  text "0.010mm" at 144.293,62.611 h1.8
  text "3.5" at 163.788,62.611 h1.8
  text "GTS" at 180.884,62.611 h1.8
  text "1" at 78.31,59.012 h1.8
  text "Top Layer" at 90.608,59.012 h1.8
  text "0.035mm" at 144.293,59.012 h1.8
  text "GTL" at 180.884,59.012 h1.8
  text "Dielectric 1" at 90.608,55.412 h1.8
  text "FR-4" at 118.5,55.412 h1.8
  text "0.360mm" at 144.293,55.412 h1.8
  text "4.8" at 163.788,55.412 h1.8
  text "2" at 78.31,51.812 h1.8
  text "Layer 2" at 90.608,51.812 h1.8
  text "0.035mm" at 144.293,51.812 h1.8
  text "G1" at 180.884,51.812 h1.8
  text "Dielectric 2" at 90.608,48.212 h1.8
  text "FR-4" at 118.5,48.212 h1.8
  text "0.710mm" at 144.293,48.212 h1.8
  text "4.8" at 163.788,48.212 h1.8
  text "3" at 78.31,44.612 h1.8
  text "Layer 3" at 90.608,44.612 h1.8
  text "0.035mm" at 144.293,44.612 h1.8
  text "G2" at 180.884,44.612 h1.8
  text "Dielectric 3" at 90.608,41.012 h1.8
  text "FR-4" at 118.5,41.012 h1.8
  text "0.360mm" at 144.293,41.012 h1.8
  text "4.8" at 163.788,41.012 h1.8
  text "4" at 78.31,37.412 h1.8
  text "Bottom Layer" at 90.608,37.412 h1.8
  text "0.035mm" at 144.293,37.412 h1.8
  text "GBL" at 180.884,37.412 h1.8
  text "Bottom Solder" at 90.608,33.812 h1.8
  text "Solder Resist" at 118.5,33.812 h1.8
  text "0.010mm" at 144.293,33.812 h1.8
  text "3.5" at 163.788,33.812 h1.8
  text "GBS" at 180.884,33.812 h1.8
  text "Bottom Overlay" at 90.608,30.212 h1.8
  text "GBO" at 180.884,30.212 h1.8
  text "Total board thickness:" at 78.31,26.612 h1.8
  text "1.590mm" at 144.293,26.612 h1.8
Drill Drawing:
  circle w0.254: c78.576,-15.998 r0.847
  lines w0.254: 77.729,-20.655 79.423,-20.655 79.423,-18.961 77.729,-18.961 77.729,-20.655
  lines w0.381: 76.211,-21.798 169.862,-21.798 ; 76.211,-14.178 169.862,-14.178 ; 90.203,-25.608 90.203,-10.368 ; 103.915,-25.608 103.915,-10.368 ; 122.249,-25.608 122.249,-10.368 ; 135.098,-25.608 135.098,-10.368 ; 153.737,-25.608 153.737,-10.368 ; 76.211,-25.608 169.862,-25.608 169.862,-10.368 76.211,-10.368 76.211,-25.608
  text "Symbol" at 78.497,-13.035 h1.83
  text "Count" at 91.346,-13.035 h1.83
  text "Hole Size" at 105.058,-13.035 h1.83
  text "Plated" at 123.392,-13.035 h1.83
  text "Hole Type" at 136.241,-13.035 h1.83
  text "Via/Pad" at 154.88,-13.035 h1.83
  text "36" at 91.346,-16.845 h1.52
  text "0.25mm" at 105.058,-16.845 h1.52
  text "PTH" at 123.392,-16.845 h1.52
  text "Round" at 136.241,-16.845 h1.52
  text "Via" at 154.88,-16.845 h1.52
  text "13" at 91.346,-20.655 h1.52
  text "0.40mm" at 105.058,-20.655 h1.52
  text "PTH" at 123.392,-20.655 h1.52
  text "Round" at 136.241,-20.655 h1.52
  text "Via" at 154.88,-20.655 h1.52
  text "49 Total" at 91.346,-24.465 h1.52
  text "Via drill diameters are given before plating. / Non-via drill diameters are given after plating, if any. / All drill tolerances are given after plating, if any." at 76,-37 h1.8

## Dimensions
0,-0.1 to 21.46,24.025 on Dimensions
0,-0.1 to 24.025,21.46 on Dimensions